# EAGLE board design (EAGLE 6.6.0)
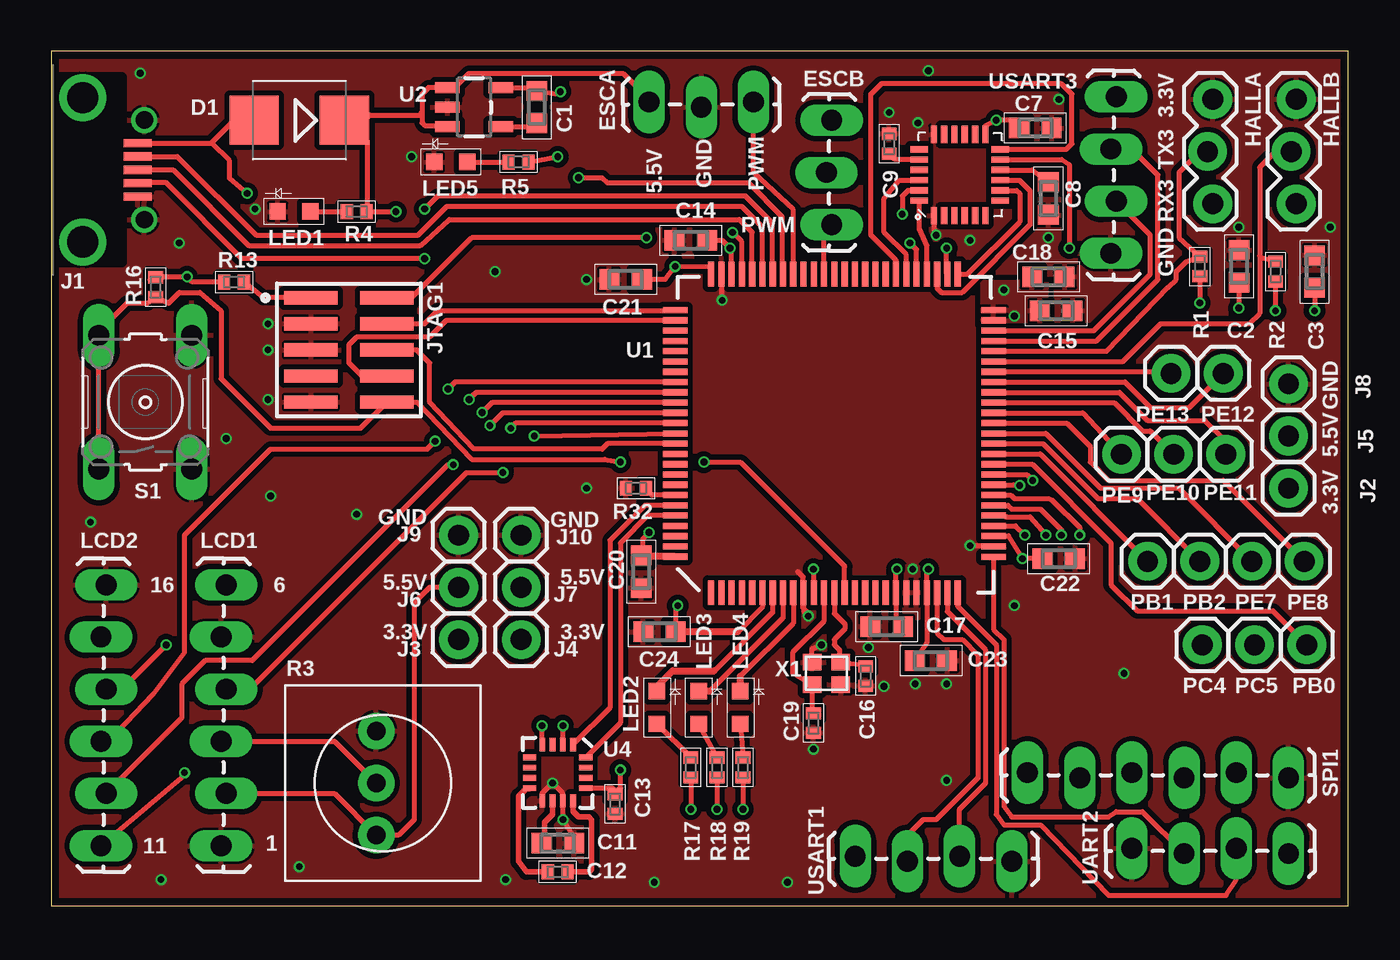
[diagram p0: board, top side]
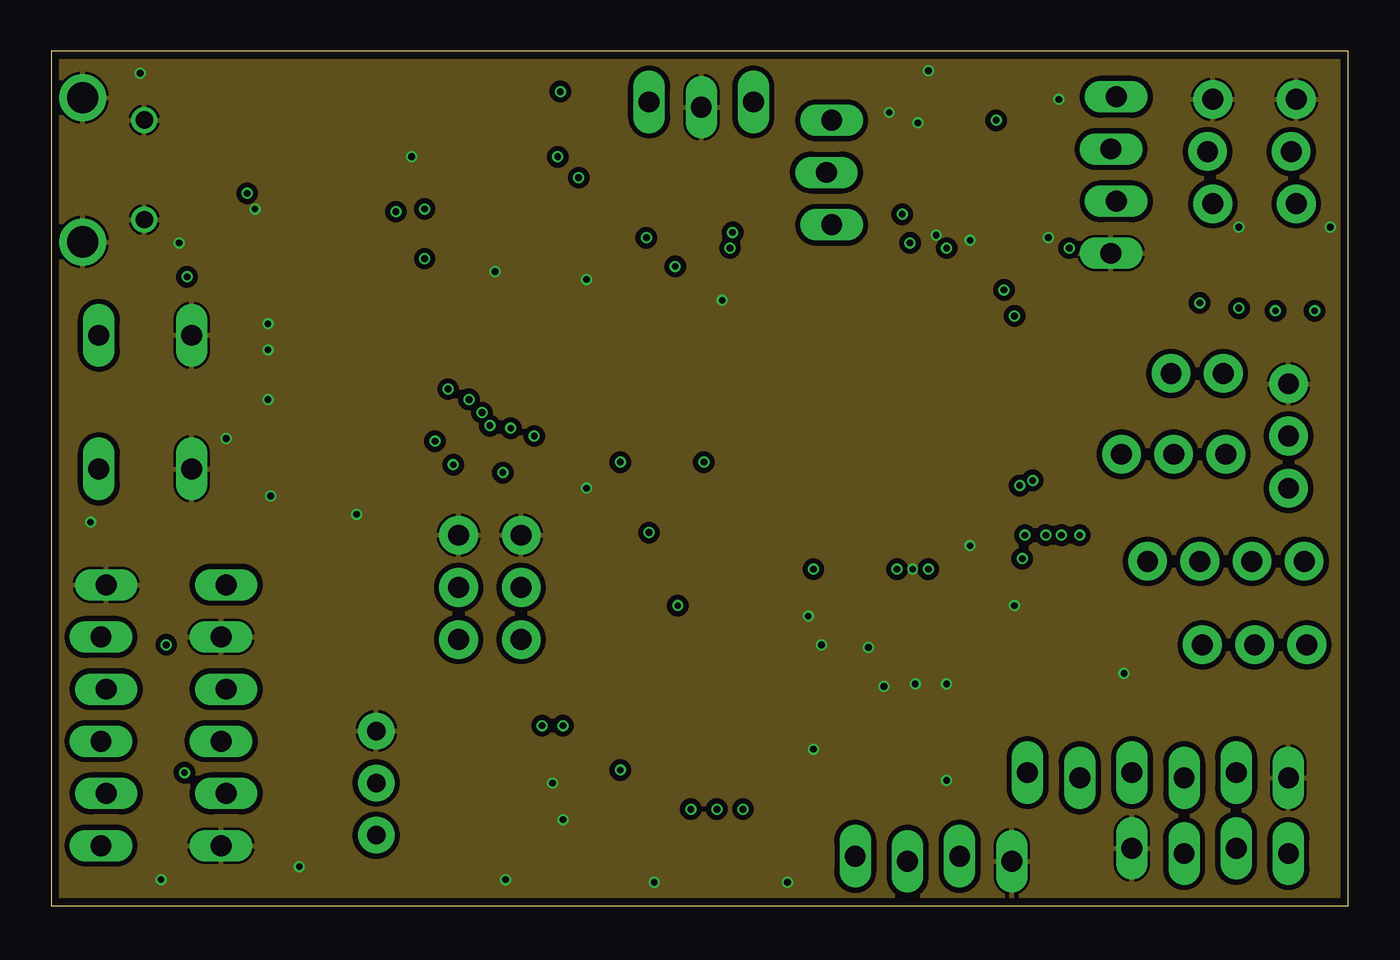
[diagram p1: board, inner layer GND]
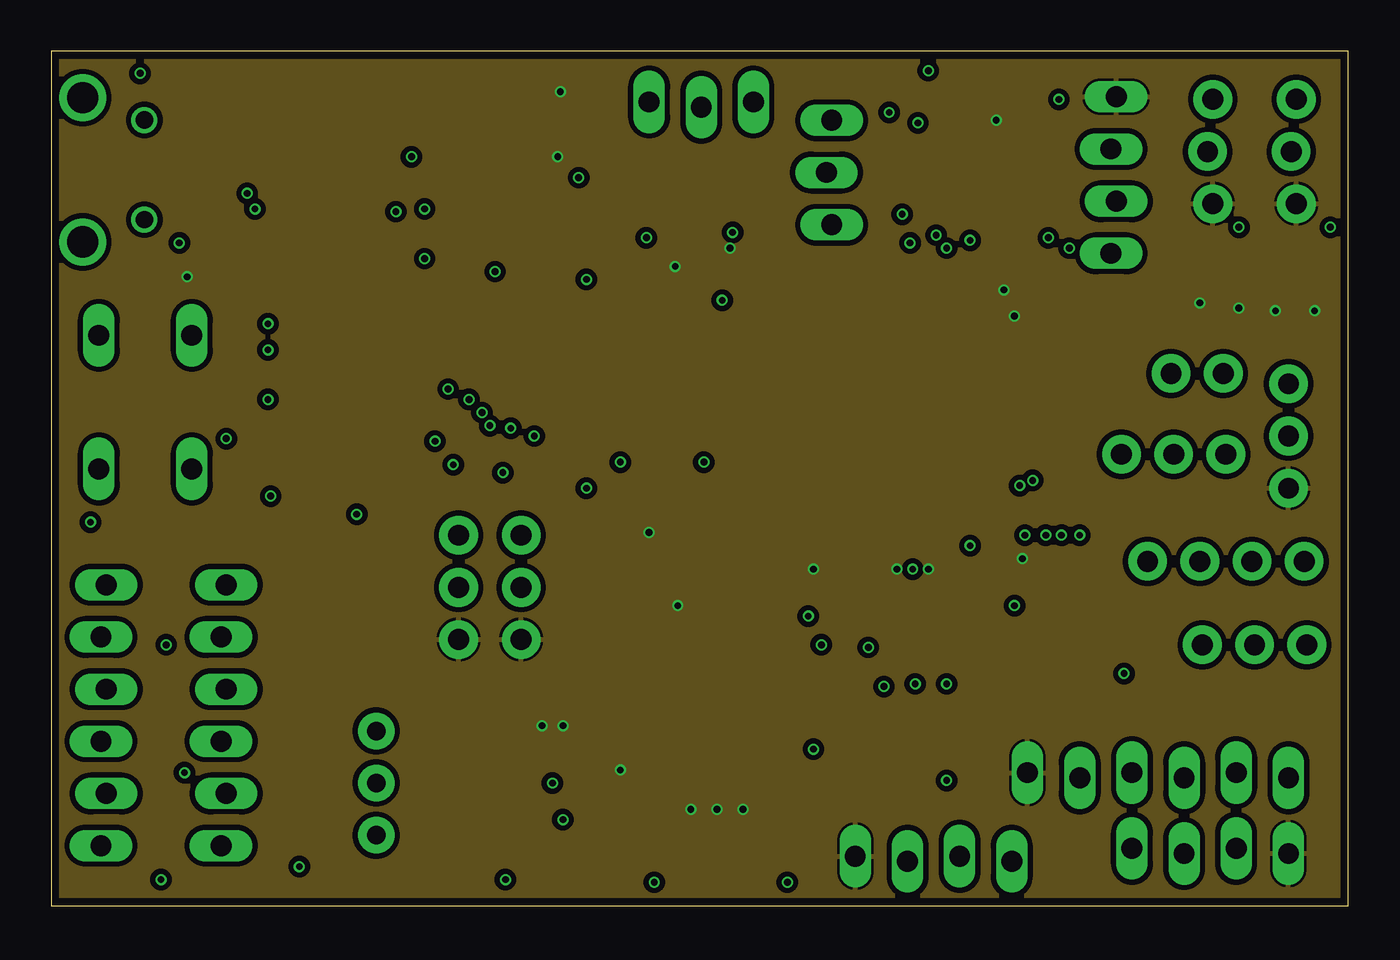
[diagram p2: board, inner layer SUP]
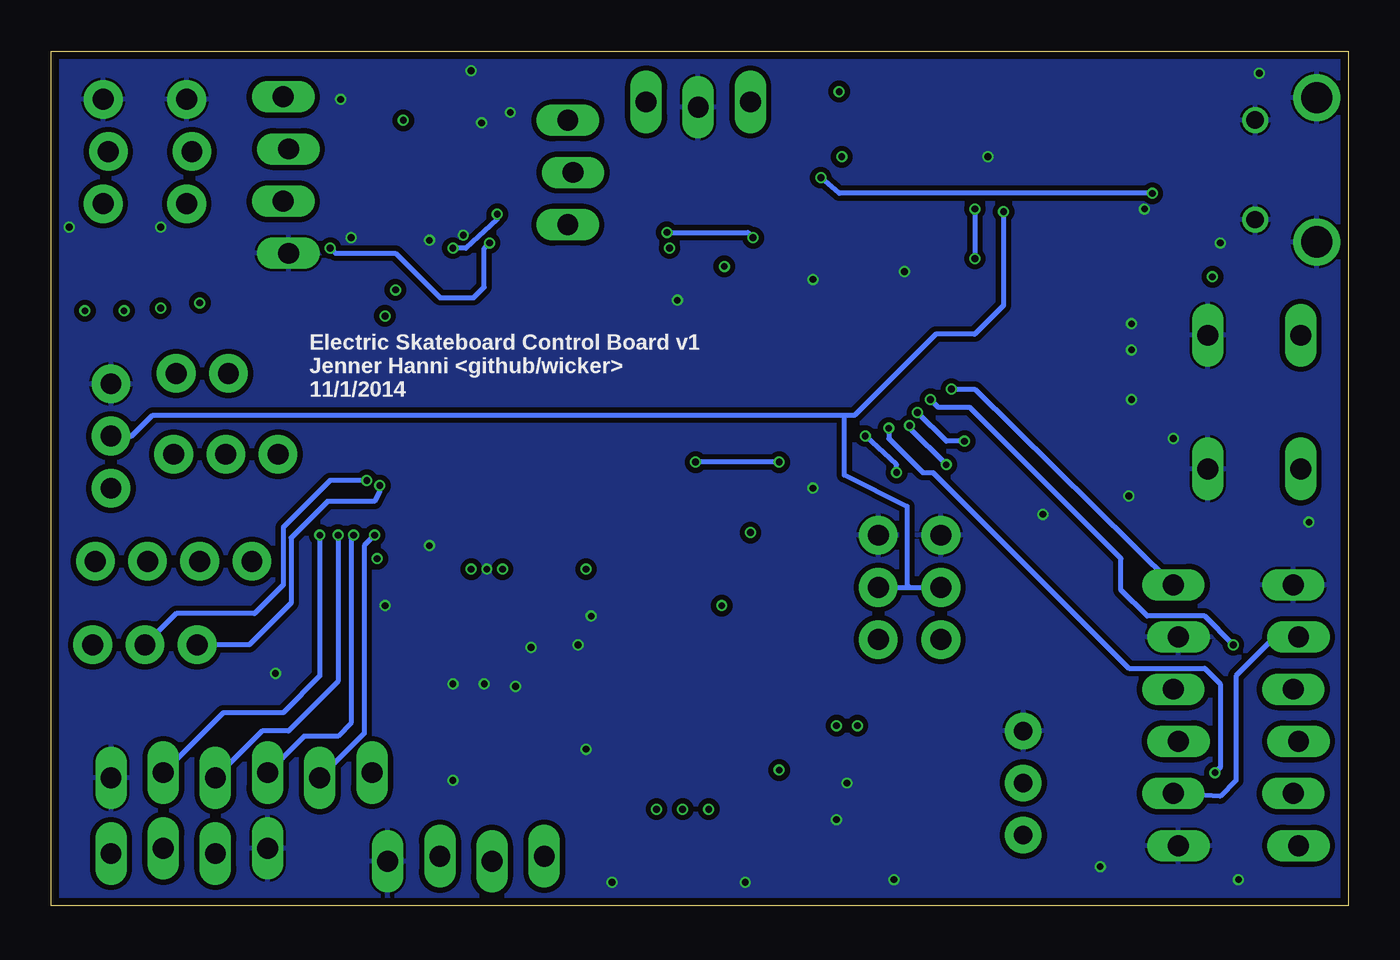
[diagram p3: board, bottom side, seen from below]

Size 63.1 x 41.58 mm. Coordinates in mm from the lower left corner, seen from the top.
Outline: 0,0 63.1,0 63.1,41.58 0,41.58 0,0
Copper layers (1+2*15+16): Top 0.035559375mm / dielectric 0.17018125mm / GND 0.01778125mm / dielectric 47mil / SUP 0.01778125mm / dielectric 0.17018125mm / Bottom 0.035559375mm
Design rules "osh-park-4layer": minimum track width 5mil, minimum drill 10mil, track to track 5mil, track to pad 5mil, pad to pad 5mil, via to via 5mil, smd to smd 5mil, copper to edge 15mil, drill to drill 5mil, minimum pad ring 7mil, minimum via ring 4mil, stop-mask expansion 3mil, vias tented up to drill 0mil, thermal gap 5mil

## Footprints (pad centres in the part's own frame; a part is rotated, then mirrored left to right if it is on the bottom)
RLC-0603 = smd 0.95 x 1: 1 0.8,0; 2 -0.8,0
RLC-0402 = smd 0.59 x 0.72: 1 -0.48,0; 2 0.48,0
SMB = smd 2.4 x 2.4: A 2.2,0; C -2.2,0
1X03_LOCK_LONGPADS = drill 1.016 long: 1 0,0; 2 2.54,-0.254; 3 5.08,0
1X03_LOCK = drill 1.016 pad 1.88: 1 0,0.127; 2 2.54,-0.127; 3 5.08,0.127
ZX62D-B-5P8 = smd 0.4 x 1.35: P1 -1.3,2.675; P2 -0.65,2.675; P3 0,2.675; P4 0.65,2.675; P5 1.3,2.675 | drill 1.524: P$1 3.51,0; P$2 -3.51,0 | drill 0.838: P$3 -2.425,3; P$4 2.425,3
1X01 = drill 1.016 pad 1.88: 1 0,0
2X05_1.27MM_SMT = smd 0.65 x 2.6: 1 -2.54,-1.85; 2 -2.54,1.85; 3 -1.27,-1.85; 4 -1.27,1.85; 5 0,-1.85; 6 0,1.85; 7 1.27,-1.85; 8 1.27,1.85; 9 2.54,-1.85; 10 2.54,1.85
1X06_LOCK_LONGPADS = drill 1.016 long: 1 0,0; 2 2.54,-0.254; 3 5.08,0; 4 7.62,-0.254; 5 10.16,0; 6 12.7,-0.254
LED0603 = smd 0.8 x 0.8: A 0,0.8; C 0,-0.8
TRIM-3386 = drill 0.9 pad 1.778: 1 -2.54,-0.318; 2 0,-0.318; 3 2.54,-0.318
B3F-10XX = drill 1.016 long: 1 -3.251,2.261; 2 3.251,2.261; 3 -3.251,-2.261; 4 3.251,-2.261
STM32F4_LQFP100 = smd 1.2 x 0.3: BOOT0 -7.75,-3; PA3 7.75,-6.016; PA4 7.75,-4.5; PA5 7.75,-4; PA6 7.75,-3.5; PA7 7.75,-3; PA14 -7.75,6; PA15 -7.75,5.5; PB0 7.75,-1.5; PB1 7.75,-1; PB2 7.75,-0.5; PB3 -7.75,-0.5; PB4 -7.75,-1; PB5 -7.75,-1.5; PB6 -7.75,-2; PB7 -7.75,-2.5; PB8 -7.75,-3.5; PB9 -7.75,-4; PB10 7.75,4.5; PB11 7.75,5; PC4 7.75,-2.5; PC5 7.75,-2; PC10 -7.75,5; PC11 -7.75,4.5; PC12 -7.75,4; PD0 -7.75,3.5; PD1 -7.75,3; PD2 -7.75,2.5; PD3 -7.75,2; PD4 -7.75,1.5; PD5 -7.75,1; PD6 -7.75,0.5; PD7 -7.75,0; PDR_ON -7.75,-5.5; PE0 -7.75,-4.5; PE1 -7.75,-5; PE7 7.75,0; PE8 7.75,0.5; PE9 7.75,1; PE10 7.75,1.5; PE11 7.75,2; PE12 7.75,2.5; PE13 7.75,3; PE14 7.75,3.5; PE15 7.75,4; VCAP1 7.75,5.5; VDD3 7.75,-4.984; VDD4 7.75,6; VDD6 -7.75,-6; VSS2 7.75,-5.5 | smd 0.3 x 1.2: NRST 0.5,-7.75; PA0 5,-7.75; PA1 5.5,-7.75; PA2 6,-7.75; PA8 -2,7.75; PA9 -2.5,7.75; PA10 -3,7.75; PA11 -3.5,7.75; PA12 -4,7.75; PA13 -4.5,7.75; PB12 6,7.75; PB13 5.5,7.75; PB14 5,7.75; PB15 4.5,7.75; PC0 1,-7.75; PC1 1.5,-7.75; PC2 2,-7.75; PC3 2.5,-7.75; PC6 0,7.75; PC7 -0.5,7.75; PC8 -1,7.75; PC9 -1.5,7.75; PC13 -3,-7.75; PC14 -2.5,-7.75; PC15 -2,-7.75; PD8 4,7.75; PD9 3.5,7.75; PD10 3,7.75; PD11 2.5,7.75; PD12 2,7.75; PD13 1.5,7.75; PD14 1,7.75; PD15 0.5,7.75; PE2 -6,-7.75; PE3 -5.5,-7.75; PE4 -5,-7.75; PE5 -4.5,-7.75; PE6 -4,-7.75; PH0 -0.5,-7.75; PH1 0,-7.75; VBAT -3.5,-7.75; VCAP2 -5,7.75; VDD1 -1,-7.75; VDD2 3,-7.75; VDD5 -6,7.75; VDDA 4.5,-7.75; VREF+ 4,-7.75; VSS1 -1.5,-7.75; VSS3 -5.5,7.75; VSSA 3.5,-7.75
SPARKFUN_SOT23-5 = smd 0.55 x 1.2: 1 -0.95,-1.3; 2 0,-1.3; 3 0.95,-1.3; 4 0.95,1.3; 5 -0.95,1.3
QFN.24.4X4 = smd 0.838 x 0.305: 1 -1.975,1.25; 2 -1.975,0.75; 3 -1.975,0.25; 4 -1.975,-0.25; 5 -1.975,-0.75; 6 -1.975,-1.25; 13 1.975,-1.25; 14 1.975,-0.75; 15 1.975,-0.25; 16 1.975,0.25; 17 1.975,0.75; 18 1.975,1.25 | smd 0.305 x 0.838: 7 -1.25,-1.975; 8 -0.75,-1.975; 9 -0.25,-1.975; 10 0.25,-1.975; 11 0.75,-1.975; 12 1.25,-1.975; 19 1.25,1.975; 20 0.75,1.975; 21 0.25,1.975; 22 -0.25,1.975; 23 -0.75,1.975; 24 -1.25,1.975
16LPCC = smd 0.65 x 0.28: 1 -1.37,0.75; 2 -1.37,0.25; 3 -1.37,-0.25; 4 -1.37,-0.75; 9 1.37,-0.75; 10 1.37,-0.25; 11 1.37,0.25; 12 1.37,0.75 | smd 0.28 x 0.65: 5 -0.75,-1.37; 6 -0.25,-1.37; 7 0.25,-1.37; 8 0.75,-1.37; 13 0.75,1.37; 14 0.25,1.37; 15 -0.25,1.37; 16 -0.75,1.37
1X04_LOCK_LONGPADS = drill 1.016 long: 1 0,0; 2 2.54,-0.254; 3 5.08,0; 4 7.62,-0.254
8Y_25MHZCRYSTAL_8Y = smd 0.9 x 0.8: 1 -0.7,-0.55; 2 0.7,-0.55; 3 0.7,0.55; 4 -0.7,0.55

## Placement (x,y rotation side)
C1  100nF  [RLC-0603]  23.62,38.86 270 top
C2  100nF  [RLC-0603]  57.78,31.11 90 top
C3  100nF  [RLC-0603]  61.47,30.86 90 top
C7  100nF  [RLC-0603]  47.88,37.85 0 top
C8  100nF  [RLC-0603]  48.51,34.42 270 top
C9  10nF  [RLC-0402]  40.77,37.08 90 top
C11  4.7uF  [RLC-0603]  24.64,3.05 0 top
C12  220nF  [RLC-0402]  24.64,1.65 0 top
C13  220nF  [RLC-0402]  27.43,4.95 270 top
C14  2.2uF  [RLC-0603]  31.11,32.38 0 top
C15  2.2uF  [RLC-0603]  48.9,28.96 180 top
C16  15pF  [RLC-0402]  39.62,11.18 90 top
C17  100nF  [RLC-0603]  40.64,13.59 0 top
C18  100nF  [RLC-0603]  48.51,30.61 180 top
C19  15pF  [RLC-0402]  37.08,8.89 90 top
C20  100nF  [RLC-0603]  28.7,16.26 90 top
C21  100nF  [RLC-0603]  27.94,30.48 0 top
C22  100nF  [RLC-0603]  49.02,16.89 180 top
C23  100nF  [RLC-0603]  42.8,11.94 180 top
C24  100nF  [RLC-0603]  29.59,13.34 0 top
D1  15V 1A  [SMB]  12.06,38.23 180 top
ESCA  ESCA  [1X03_LOCK_LONGPADS]  29.08,39.12 0 top
ESCB  ESCB  [1X03_LOCK_LONGPADS]  37.97,38.23 270 top
HALLA  HALLA  [1X03_LOCK]  56.39,39.24 270 top
HALLB  HALLB  [1X03_LOCK]  60.45,39.24 270 top
J1  ZX62D-B-5P8  [ZX62D-B-5P8]  1.52,35.81 270 top
J2  [1X01]  60.2,20.32 0 top
J3  [1X01]  19.81,12.95 0 top
J4  [1X01]  22.86,12.95 0 top
J5  [1X01]  60.2,22.86 0 top
J6  [1X01]  19.81,15.49 0 top
J7  [1X01]  22.86,15.49 0 top
J8  [1X01]  60.2,25.4 0 top
J9  [1X01]  19.81,18.03 0 top
J10  [1X01]  22.86,18.03 0 top
JTAG1  MINI-JTAG  [2X05_1.27MM_SMT]  14.48,27.05 270 top
LCD1  PINS1-6  [1X06_LOCK_LONGPADS]  8.26,2.92 90 top
LCD2  PINS11-16  [1X06_LOCK_LONGPADS]  2.41,2.92 90 top
LED1  GREEN  [LED0603]  11.81,33.78 270 top
LED2  BG1111C  [LED0603]  29.46,9.65 180 top
LED3  BG1111C  [LED0603]  31.5,9.65 180 top
LED4  BG1111C  [LED0603]  33.53,9.65 180 top
LED5  GREEN  [LED0603]  19.43,36.2 270 top
PB0  [1X01]  61.09,12.7 0 top
PB1  [1X01]  53.34,16.76 0 top
PB2  [1X01]  55.88,16.76 0 top
PC4  [1X01]  56.01,12.7 0 top
PC5  [1X01]  58.55,12.7 0 top
PE7  [1X01]  58.42,16.76 0 top
PE8  [1X01]  60.96,16.76 0 top
PE9  [1X01]  52.07,21.97 0 top
PE10  [1X01]  54.61,21.97 0 top
PE11  [1X01]  57.15,21.97 0 top
PE12  [1X01]  57.02,25.91 0 top
PE13  [1X01]  54.48,25.91 0 top
R1  1.5k  [RLC-0402]  55.88,31.11 270 top
R2  1.5k  [RLC-0402]  59.56,30.86 270 top
R3  TRIMPOT  [TRIM-3386]  16.13,5.97 270 top
R4  499  [RLC-0402]  14.86,33.78 180 top
R5  250  [RLC-0402]  22.73,36.2 180 top
R13  100  [RLC-0402]  8.89,30.35 180 top
R16  10k  [RLC-0402]  5.08,30.1 90 top
R17  49.9  [RLC-0402]  31.11,6.73 90 top
R18  49.9  [RLC-0402]  32.38,6.73 90 top
R19  49.9  [RLC-0402]  33.66,6.73 90 top
R32  10k  [RLC-0402]  28.45,20.32 180 top
S1  RESET  [B3F-10XX]  4.57,24.51 90 top
SPI1  SPI1  [1X06_LOCK_LONGPADS]  60.2,6.22 180 top
U1  STM32F4_STM32F4V_100PIN_FOXCAR  [STM32F4_LQFP100]  38.1,22.99 0 top
U2  MICLDO  [SPARKFUN_SOT23-5]  20.57,38.86 270 top
U3  MPU6000  [QFN.24.4X4]  44.2,35.56 90 top
U4  HMC5883LSMD  [16LPCC]  24.64,6.48 270 top
UART2  UART2  [1X04_LOCK_LONGPADS]  52.58,2.79 0 top
USART1  USART1  [1X04_LOCK_LONGPADS]  46.74,2.16 180 top
USART3  USART3  [1X04_LOCK_LONGPADS]  51.56,31.75 90 top
X1  25MHz 8Y  [8Y_25MHZCRYSTAL_8Y]  37.72,11.3 0 top

## Library data of the parts
C1-C3 C7-C9 C11-C24 LED1-LED5 R1 R2 R4 R5 R13 R16-R19 R32 = max-viz
D1 = diode
ESCA ESCB HALLA HALLB J2-J10 LCD1 LCD2 PB0 PB1 PB2 PC4 PC5 PE7-PE13 SPI1 UART2 USART1 USART3 = SparkFun-Connectors
J1 = con-hirose-microusb
JTAG1 = microbuilder
R3 = adafruit
S1 = switch-omron; MPN: B3F-1000; OC_FARNELL: 176432; OC_NEWARK: 36M3542
U1 = eskate-v1
U2 = v1-cellphone
U3 = invensense
U4 = SparkFun-Sensors
X1 = v2-rf-frontend-board

## Nets
3.3V: C1.2 C2.2 C3.2 C7.2 C13.1 C14.1 C15.1 C17.1 C18.1 C20.1 C21.1 C22.1 C23.1 C24.1 HALLA.3 HALLB.3 J2.1 J3.1 J4.1 R1.2 R2.2 R5.1 R13.2 R16.2 R17.1 R18.1 R19.1 SPI1.6 U1.VBAT U1.VCAP1 U1.VCAP2 U1.VDD1 U1.VDD2 U1.VDD3 U1.VDD4 U1.VDD5 U1.VDD6 U1.VDDA U2.5 U3.13 U4.2 U4.4 U4.13 UART2.4 USART1.4 USART3.4
5.5V: D1.C ESCA.1 J5.1 J6.1 J7.1 LCD1.2 LCD2.5 R3.3 R4.1 U2.1 U2.3
BOOT0: R32.1 U1.BOOT0
ESCA_PWM: ESCA.3 U1.PA8
ESCB_PWM: ESCB.3 U1.PC7
FS_ID: J1.P4 U1.PA10
FS_N: J1.P2 U1.PA11
FS_P: J1.P3 U1.PA12
FS_VBUS: D1.A J1.P1 U1.PA9
GND: C2.1 C3.1 C7.1 C8.1 C9.2 C11.1 C13.2 C14.2 C15.2 C16.1 C17.2 C18.2 C19.1 C20.2 C21.2 C22.2 C23.2 C24.2 ESCA.2 HALLA.1 HALLB.1 J1.P5 J1.P$1 J1.P$2 J1.P$3 J1.P$4 J8.1 J9.1 J10.1 JTAG1.3 JTAG1.5 JTAG1.9 LCD1.1 LCD1.5 LCD2.6 LED1.C LED5.C R3.1 R32.2 S1.3 S1.4 SPI1.1 U1.VREF+ U1.VSS1 U1.VSS2 U1.VSS3 U1.VSSA U2.2 U3.1 U3.18 U4.9 U4.11 UART2.1 USART1.1 USART3.1 X1.2 X1.4
HALLAOUT: HALLA.2 R1.1 U1.PE15
HALLBOUT: HALLB.2 R2.1 U1.PE14
IMU_CLKOUT: U1.PD9 U3.22
IMU_FSYNC: U1.PD8 U3.11
IMU_INT: U1.PD10 U3.12
LCD_DATA4: LCD2.1 U1.PD6
LCD_DATA5: LCD2.2 U1.PD5
LCD_DATA6: LCD2.3 U1.PD4
LCD_DATA7: LCD2.4 U1.PD3
LCD_EN: LCD1.6 U1.PD2
LCD_RS: LCD1.4 U1.PD7
LCD_V0: LCD1.3 R3.2
LED_B: LED4.C U1.PC15
LED_G: LED3.C U1.PC14
LED_R: LED2.C U1.PC13
N$1: LED5.A R5.2
N$2: LED1.A R4.2
N$3: C1.1 U2.4
N$4: C12.2 U4.12
N$5: LED2.A R17.2
N$6: LED3.A R18.2
N$7: LED4.A R19.2
N$11: C12.1 U4.8
N$12: C11.2 U4.10
N$18: C9.1 U3.20
N$20: JTAG1.1 R13.1
NRST: JTAG1.10 R16.1 S1.1 S1.2 U1.NRST
OSC_IN1: C19.2 U1.PH0 X1.1
OSC_OUT1: C16.2 U1.PH1 X1.3
PB0: PB0.1 U1.PB0
PB1: PB1.1 U1.PB1
PB2: PB2.1 U1.PB2
PC4: PC4.1 U1.PC4
PC5: PC5.1 U1.PC5
PE7: PE7.1 U1.PE7
PE8: PE8.1 U1.PE8
PE9: PE9.1 U1.PE9
PE10: PE10.1 U1.PE10
PE11: PE11.1 U1.PE11
PE12: PE12.1 U1.PE12
PE13: PE13.1 U1.PE13
REGOUT: C8.2 U3.10
RX1: U1.PA1 USART1.2
RX2: U1.PA3 UART2.2
RX3: U1.PB11 USART3.2
SCL1: U1.PB8 U4.1
SDA1: U1.PB9 U4.16
SPI1_MISO: SPI1.3 U1.PA6
SPI1_MOSI: SPI1.2 U1.PA7
SPI1_NSS: SPI1.5 U1.PA4
SPI1_SCK: SPI1.4 U1.PA5
SPI2_CS: U1.PB12 U3.8
SPI2_MISO: U1.PB14 U3.9
SPI2_MOSI: U1.PB15 U3.24
SPI2_SCK: U1.PB13 U3.23
TCK: JTAG1.4 U1.PA14
TDI: JTAG1.8 U1.PA15
TDO: JTAG1.6 U1.PB3
TMS: JTAG1.2 U1.PA13
TX1: U1.PA0 USART1.3
TX2: U1.PA2 UART2.3
TX3: U1.PB10 USART3.3

## Tracks (layer width: path | path; a pad name or v marks a point on that pad's centre or on a via)
3.3V  (via drill 0.33 pad 0.51)
  Top 0.254: U1.VBAT 34.6,14.53 33.4,13.34 | U2.5 23.32,39.81 C1.2 24.53,39.51 v24.77,39.62 | C21.1 29.86,30.48 v30.35,31.12 | U1.VDD1 37.1,16.37 v37.08,16.38 | U1.VCAP2 33.1,31.92 v33.02,32 32.64,32.38 C14.1 | R16.2 4.8,30.45 4.95,30.61 6.59,30.62 v6.6,30.61 6.86,30.35 R13.2 | v27.69,6.6 27.7,5.73 C13.1 27.31,5.73 U4.13 | R17.1 v31.11,4.7 | R18.1 v32.38,4.7 | R19.1 v33.66,4.7 | 28.78,16.99 28.78,17.86 v29.08,18.16 | v30.35,31.12 v30.35,31.11 | v30.35,31.12 32.13,31.11 32.1,30.77 U1.VDD5 | R5.1 v24.64,36.45 | C7.2 47.12,38.23 v45.97,38.23 45.45,37.95 U3.13 | v41.15,16.38 41.1,16.34 U1.VDD2 41.1,13.65 C17.1 | U1.VDD3 46.58,18 v47.24,16.89 C22.1 | R1.2 v55.88,29.34 | C2.2 v57.78,29.08 | R2.2 v59.56,28.96 | C3.2 v61.47,28.96 | U4.4 v23.89,8.75 v23.88,8.76 | U4.2 24.89,8.51 v24.89,8.76 | C23.1 42.6,12.8 U1.VDDA 42.6,16.31 v42.67,16.38 | C24.1 30.39,14.52 v30.48,14.61
  Top 0.33: 33.4,13.34 C24.1 | U1.VDD6 28.78,16.99 C20.1
  other vias: 46.35,29.97 46.86,28.7
  pour SUP (isolate 0.254): -0.13,-0.13 -0.13,41.66 67.94,41.66 67.94,-0.38
  pour Top: 45.34,28.45 45.34,30.35 48.39,30.35 48.39,28.45
5.5V  (via drill 0.33 pad 0.51)
  Top 0.254: U2.3 19.21,37.97 18.16,37.97 18.03,38.1 18.03,38.61 | 18.03,38.61 18.03,39.5 18.35,39.81 U2.1 19.62,39.81 20.32,40.51 27.81,40.51 28.96,39.37 ESCA.1 | v16.76,33.78 R4.1 15.37,33.81 15.37,37.21 | LCD1.2 13.78,5.46 R3.3 16.89,3.43 17.65,4.19 17.65,14.73 18.41,15.49 J6.1 | D1.C 14.35,38.23 15.37,37.21 | 15.37,37.21 15.37,38.35 15.49,38.48 17.91,38.48 18.03,38.61
  Bottom 0.254: J7.1 21.34,15.49 | 21.34,15.49 J6.1 | v16.76,33.78 16.76,29.21 18.16,27.81 20.07,27.81 24,23.88 24.51,23.88 | 21.34,15.49 21.46,15.62 21.46,19.43 24.51,20.95 24.51,23.88 | J5.1 59.18,22.86 58.17,23.88 24.51,23.88 | LCD2.5 3.56,13.08 5.46,11.18 5.46,6.1 6.22,5.33 LCD1.2
BOOT0
  Top 0.254: U1.BOOT0 29.21,19.99 R32.1
ESCA_PWM
  Top 0.254: U1.PA8 36.1,33.88 34.16,35.69 ESCA.3
ESCB_PWM
  Top 0.254: U1.PC7 37.6,32.9 ESCB.3
FS_ID  (via drill 0.33 pad 0.51)
  Top 0.254: U1.PA10 35.1,33.23 33.78,34.54 18.8,34.54 v18.16,33.91 | v18.16,31.5 9.27,31.5 5.59,35.18 4.21,35.18 J1.P4
  Bottom 0.254: v18.16,33.91 v18.16,31.5
FS_N
  Top 0.254: J1.P2 6.13,36.46 9.96,32.64 17.85,32.64 19.25,34.04 33.58,34.04 34.6,33.02 U1.PA11
FS_P
  Top 0.254: J1.P3 5.92,35.81 9.6,32.13 17.96,32.13 19.36,33.4 33.48,33.4 34.1,32.78 U1.PA12
FS_VBUS  (via drill 0.33 pad 0.51)
  Top 0.254: J1.P1 7.81,37.11 | U1.PA9 35.56,30.78 35.56,33.53 33.91,35.18 27.05,35.18 26.8,35.43 v25.65,35.43 | v9.53,34.67 8.66,35.4 8.66,36.26 7.81,37.11 | 7.81,37.11 7.81,37.14 8.89,38.23 D1.A
  Bottom 0.254: v9.53,34.67 24.77,34.67 v25.65,35.43
GND  (via drill 0.33 pad 0.51)
  Top 0.254: 36.32,16.26 36.58,16 36.58,14.48 36.83,14.22 v36.83,14.1 36.6,14.33 U1.VSS1 | U1.VSS3 32.6,29.5 v32.64,29.46 | U4.9 23.89,5.47 v24.38,5.97 24.89,5.46 U4.11 v24.89,4.19 25.29,3.56 C11.1 | v44.7,17.53 45.81,17.53 U1.VSS2 | U3.1 42.95,32.79 v43.05,32.64 | X1.4 37.02,12.51 v37.47,12.7
  other vias: 41.91,16.38 42.04,10.79 10.54,27.05 10.54,28.32 10.54,24.64 9.91,33.91 42.16,38.1 40.77,38.61 43.56,10.79 17.53,36.45 44.7,32.38 48.51,32.51 49.02,39.24 35.81,1.14 29.34,1.14 22.1,1.27 12.06,1.91 5.33,1.27 1.91,18.67 52.2,11.3 46.86,14.61 26.04,20.32 14.86,19.05 10.67,19.94 8.51,22.73 6.22,32.26 21.59,30.86 4.32,40.51 42.67,40.64 62.23,33.02 57.78,33.02 26.04,30.48 43.56,6.1 39.75,12.57 37.08,7.62 40.51,10.67
  pour Top (isolate 0.254, rank 5): -0.25,-0.38 -0.25,41.4 62.74,41.4 62.74,-0.64
  pour GND (isolate 0.254): -0.25,-0.38 -0.25,41.4 67.82,41.4 67.82,-0.64
  pour Bottom (isolate 0.254): -0.13,-0.13 -0.13,41.66 62.87,41.66 62.87,-0.38
  pour Top: 41.53,16.51 42.16,16.51 42.16,13.97 41.53,13.97
HALLAOUT
  Top 0.254: U1.PE15 51.36,26.99 54.36,30.1 54.74,30.48 54.74,30.86 55.22,31.34 R1.1 54.86,32.53 54.86,35.69 55.88,36.7 HALLA.2
HALLBOUT
  Top 0.254: HALLB.2 59.56,36.7 58.8,35.94 58.8,31.62 | U1.PE14 52.14,26.49 53.98,28.32 58.29,28.32 58.8,28.83 58.8,31.62 | R2.1 58.91,31.51 58.8,31.62
IMU_CLKOUT
  Top 0.254: U1.PD9 41.6,31.68 40.51,32.77 40.51,34.42 41.27,35.31 U3.22
IMU_FSYNC  (via drill 0.33 pad 0.51)
  Top 0.254: U3.11 49.16,36.31 49.53,36.07 v49.53,32 | 42.04,32 v41.78,32.26 42.1,31.94 U1.PD8
  Bottom 0.254: v49.53,32 49.28,31.75 46.35,31.75 44.2,29.59 42.55,29.59 42.04,30.1 42.04,32 v41.78,32.26
IMU_INT
  Top 0.254: U1.PD10 41.1,31.42 39.88,32.64 39.88,39.5 40.39,40.01 49.15,40.01 49.66,39.5 49.66,37.08 49.38,36.81 U3.12
LCD_DATA4  (via drill 0.33 pad 0.51)
  Top 0.254: U1.PD6 22.6,23.49 v22.35,23.24 | v6.48,6.48 6.48,6.35 LCD2.1
  Bottom 0.254: v22.35,23.24 22.35,22.73 20.7,21.08 20.19,21.08 10.67,11.56 6.99,11.56 6.22,10.79 6.22,6.73 v6.48,6.48
LCD_DATA5  (via drill 0.33 pad 0.51)
  Top 0.254: U1.PD5 21.95,23.99 v21.34,23.37 | LCD2.2 6.35,9.14 6.35,10.79 7.49,11.94 9.78,11.94 19.3,21.46 v19.56,21.46
  Bottom 0.254: v21.34,23.37 21.34,23.24 v19.56,21.46
LCD_DATA6  (via drill 0.33 pad 0.51)
  Top 0.254: U1.PD4 21.44,24.49 v20.95,24 | LCD2.3 2.79,8 4.95,10.29 6.48,12.32 6.48,18.03 10.67,22.23 18.29,22.23 v18.67,22.61
  Bottom 0.254: v18.67,22.61 19.56,22.61 v20.95,24
LCD_DATA7  (via drill 0.33 pad 0.51)
  Top 0.254: 20.57,24.89 v20.32,24.64 20.67,24.99 U1.PD3 | v5.59,12.7 3.43,10.54 LCD2.4
  Bottom 0.254: v20.32,24.64 19.94,24.26 18.41,24.26 11.05,16.89 11.05,15.37 9.78,14.1 6.99,14.1 v5.59,12.7
LCD_EN  (via drill 0.33 pad 0.51)
  Top 0.254: U1.PD2 19.64,25.49 v19.3,25.15
  Bottom 0.254: v19.3,25.15 18.16,25.15 LCD1.6
LCD_RS  (via drill 0.33 pad 0.51)
  Top 0.254: LCD1.4 9.53,10.41 20.19,21.08 v21.97,21.08 | v23.5,22.86 U1.PD7
  Bottom 0.254: v21.97,21.08 21.97,21.46 v23.5,22.86
LCD_V0
  Top 0.254: LCD1.3 13.78,8 R3.2
LED_B
  Top 0.254: 33.53,11.18 36.1,13.75 U1.PC15
  Top 0.33: LED4.C 33.53,11.18
LED_G
  Top 0.254: 32.04,10.45 35.6,14.01 U1.PC14
  Top 0.33: LED3.C 32.04,10.45
LED_R
  Top 0.254: 32.26,11.43 35.1,14.27 U1.PC13
  Top 0.33: LED2.C 29.46,10.67 30.23,11.43 32.26,11.43
N$1
  Top 0.254: LED5.A R5.2
N$2
  Top 0.254: LED1.A R4.2
N$3
  Top 0.254: U2.4 23.32,37.91 C1.1
N$4
  Top 0.279: U4.12 25.39,4.58 25.65,4.32 26.16,4.32 26.29,4.19 26.29,1.78 26.16,1.65 C12.2
N$5
  Top 0.254: LED2.A R17.2
N$6
  Top 0.254: LED3.A R18.2
N$7
  Top 0.254: LED4.A R19.2
N$11
  Top 0.254: 23.24,5.7 U4.8
  Top 0.279: C12.1 23.11,1.65 22.73,2.16 22.73,5.33 23.1,5.7 23.24,5.7
N$12
  Top 0.254: 24,3.44 C11.2
  Top 0.279: U4.10 24.39,4.45 24,4.06 24,3.44
N$18
  Top 0.254: U3.20 41.05,36.31 C9.1
N$20
  Top 0.254: JTAG1.1 10.3,29.59 R13.1
NRST  (via drill 0.33 pad 0.51)
  Top 0.254: v27.69,21.59 26.92,21.72 20.45,21.72 17.78,24.51 JTAG1.10 15.06,23.24 10.67,23.24 8.26,25.65 8.26,28.96 7.24,29.84 6.22,29.84 5.7,29.32 R16.1 4.68,29.34 3.68,29.34 2.31,27.96 S1.2 S1.1 | v31.75,21.59 33.53,21.59 38.61,16.51 38.6,16.5 U1.NRST
  Bottom 0.254: v27.69,21.59 v31.75,21.59
OSC_IN1
  Top 0.254: U1.PH0 37.59,13.84 36.07,12.32 36.07,11.32 X1.1 37.02,9.44 C19.2
OSC_OUT1
  Top 0.254: U1.PH1 38.1,14.22 38.61,13.72 38.61,13.46 38.1,12.95 38.1,12.7 38.35,12.45 38.35,11.92 X1.3 39.55,11.73 C16.2
PB0
  Top 0.254: U1.PB0 47.73,21.49 51.56,17.65 51.56,15.62 52.83,14.35 59.44,14.35 PB0.1
PB1
  Top 0.254: U1.PB1 48.12,21.99 PB1.1
PB2
  Top 0.254: U1.PB2 48.25,22.49 50.93,19.81 52.83,19.81 PB2.1
PC4  (via drill 0.33 pad 0.51)
  Top 0.254: U1.PC4 46.82,20.49 v47.12,20.45
  Bottom 0.254: v47.12,20.45 47.12,20.19 47.37,19.68 49.66,19.68 51.44,17.91 51.44,14.73 53.47,12.7 PC4.1
PC5  (via drill 0.33 pad 0.51)
  Top 0.254: U1.PC5 47.47,20.99 v47.75,20.7
  Bottom 0.254: v47.75,20.7 49.53,20.7 51.82,18.41 51.82,15.62 53.21,14.22 57.02,14.22 PC5.1
PE7
  Top 0.254: U1.PE7 48.39,22.99 51.05,20.32 54.86,20.32 PE7.1
PE8
  Top 0.254: U1.PE8 49.41,23.49 50.55,22.35 50.55,21.59 51.44,20.7 57.02,20.7 PE8.1
PE9
  Top 0.254: U1.PE9 50.18,23.99 PE9.1
PE10
  Top 0.254: U1.PE10 51.71,24.49 53.09,23.11 53.47,23.11 PE10.1
PE11
  Top 0.254: U1.PE11 51.98,24.99 53.34,23.62 56.13,23.62 57.15,22.61 PE11.1
PE12
  Top 0.254: U1.PE12 52.24,25.49 53.47,24.26 55.37,24.26 PE12.1
PE13
  Top 0.254: U1.PE13 54.4,25.99 PE13.1
REGOUT
  Top 0.254: U3.10 47.73,35.81 C8.2
RX1
  Top 0.254: USART1.2 44.2,4.7 45.47,5.97 45.47,12.45 43.6,14.31 U1.PA1
RX2
  Top 0.254: U1.PA3 45.85,13.46 46.35,12.95 46.35,4.83 46.74,4.32 51.44,4.32 51.82,4.57 53.09,4.57 UART2.2
RX3
  Top 0.254: U1.PB11 50.72,27.99 53.47,30.73 53.47,32.64 USART3.2
SCL1
  Top 0.254: U1.PB8 28.89,19.49 27.18,17.78 27.18,9.64 U4.1
SDA1
  Top 0.254: U1.PB9 29.02,18.99 27.69,17.65 27.69,8.9 U4.16
SPI1_MISO  (via drill 0.33 pad 0.51)
  Top 0.254: U1.PA6 46.55,19.49 46.74,19.3 48.13,19.3 49.15,18.29 v49.15,18.03
  Bottom 0.254: v49.15,18.03 49.15,10.92 51.56,8.51 52.83,8.51 SPI1.3
SPI1_MOSI  (via drill 0.33 pad 0.51)
  Top 0.254: U1.PA7 46.69,19.99 46.86,19.81 48.51,19.81 48.72,19.73 50.04,18.41 v50.04,18.03
  Bottom 0.254: v50.04,18.03 50.04,11.18 51.82,9.4 54.74,9.4 SPI1.2
SPI1_NSS  (via drill 0.33 pad 0.51)
  Top 0.254: U1.PA4 46.92,18.49 v47.37,18.03
  Bottom 0.254: v47.37,18.03 47.88,17.53 47.88,8.38 SPI1.5
SPI1_SCK  (via drill 0.33 pad 0.51)
  Top 0.254: U1.PA5 46.29,18.99 46.48,18.92 47.62,18.92 v48.39,18.03
  Bottom 0.254: v48.39,18.03 48.51,17.91 48.51,8.89 49.15,8.26 50.8,8.26 SPI1.4
SPI2_CS
  Top 0.254: U1.PB12 44.58,30.74 47.12,33.27 47.12,34.67 46.98,34.81 U3.8
SPI2_MISO
  Top 0.254: U3.9 47.11,35.31 47.62,34.8 47.62,33.15 44.32,29.84 43.31,29.84 43.1,30.05 U1.PB14
SPI2_MOSI
  Top 0.254: U3.24 42.22,32.96 42.6,32.08 U1.PB15
SPI2_SCK  (via drill 0.33 pad 0.51)
  Top 0.254: U3.23 41.67,34.81 41.4,34.54 v41.4,33.66 | U1.PB13 43.56,30.78 v43.56,32
  Bottom 0.254: v41.4,33.66 41.4,33.4 42.93,32 v43.56,32
TCK
  Top 0.254: JTAG1.4 18.16,28.32 18.8,28.96 30.32,28.96 U1.PA14
TDI
  Top 0.254: JTAG1.8 15.11,25.78 14.48,26.42 14.48,27.3 14.86,27.69 18.41,27.69 19.22,28.49 U1.PA15
TDO
  Top 0.254: U1.PB3 27.06,22.49 26.8,22.23 20.57,22.23 18.41,24.51 18.41,26.42 17.78,27.05 JTAG1.6
TMS  (via drill 0.33 pad 0.51)
  Top 0.254: U1.PA13 33.6,32.31 v33.15,32.77 | v28.96,32.51 20.45,32.51 17.53,29.59 JTAG1.2
  Bottom 0.254: v33.15,32.77 29.21,32.77 v28.96,32.51
TX1
  Top 0.254: U1.PA0 43.1,13.29 43.43,12.95 44.32,12.95 45.09,12.19 45.09,6.22 43.05,4.19 42.42,4.19 41.66,3.43 USART1.3
TX2
  Top 0.254: U1.PA2 44.1,14.57 45.97,12.7 45.97,4.45 46.35,3.94 48.13,3.94 51.44,0.51 57.15,0.51 57.66,1.27 UART2.3
TX3
  Top 0.254: U1.PB10 50.85,27.49 53.85,30.48 53.85,35.56 52.58,36.83 USART3.3

## Text on the board
tNames: 3.3V | TX3 | 5.5V | GND | PWM | PWM | RX3 | GND | GND | 5.5V | 3.3V | GND | GND | 16 | 5.5V | 5.5V | 6 | 3.3V | 3.3V | 11 | 1
bNames: Electric Skateboard Control Board v1 / Jenner Hanni <github/wicker> / 11/1/2014